# Altium PCB RD_BUCK.PcbDoc
Units mm, origin at the board's own origin, x right, y up, seen from the top; angles counter-clockwise.
Board outline 74.55 x 28.47 mm, 2 copper layers (Top Layer, Bottom Layer); 44 components, 24 nets, 124 pads, 0 vias.
Unrouted connection lines stored in the file: 85.
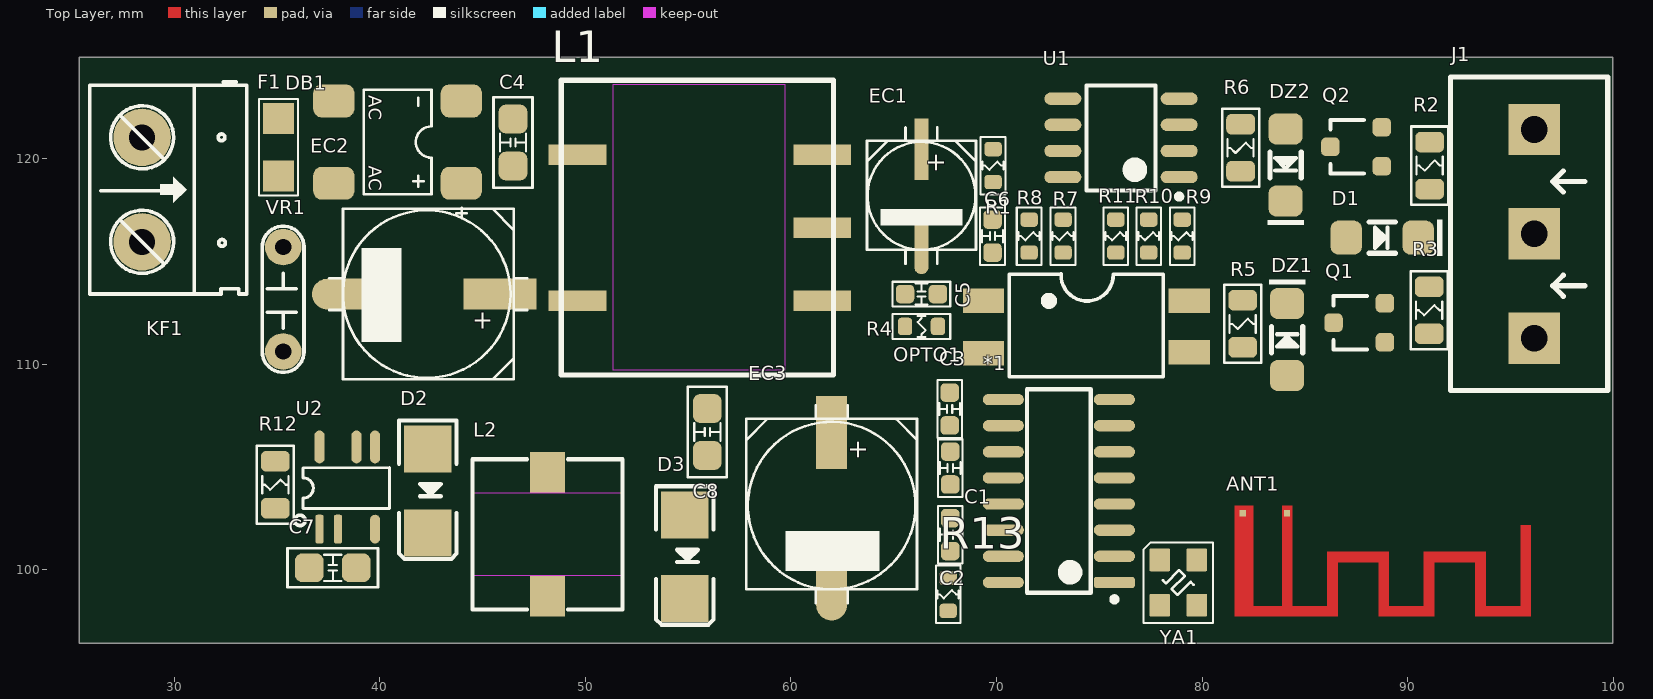
[diagram p0: Top Layer view]
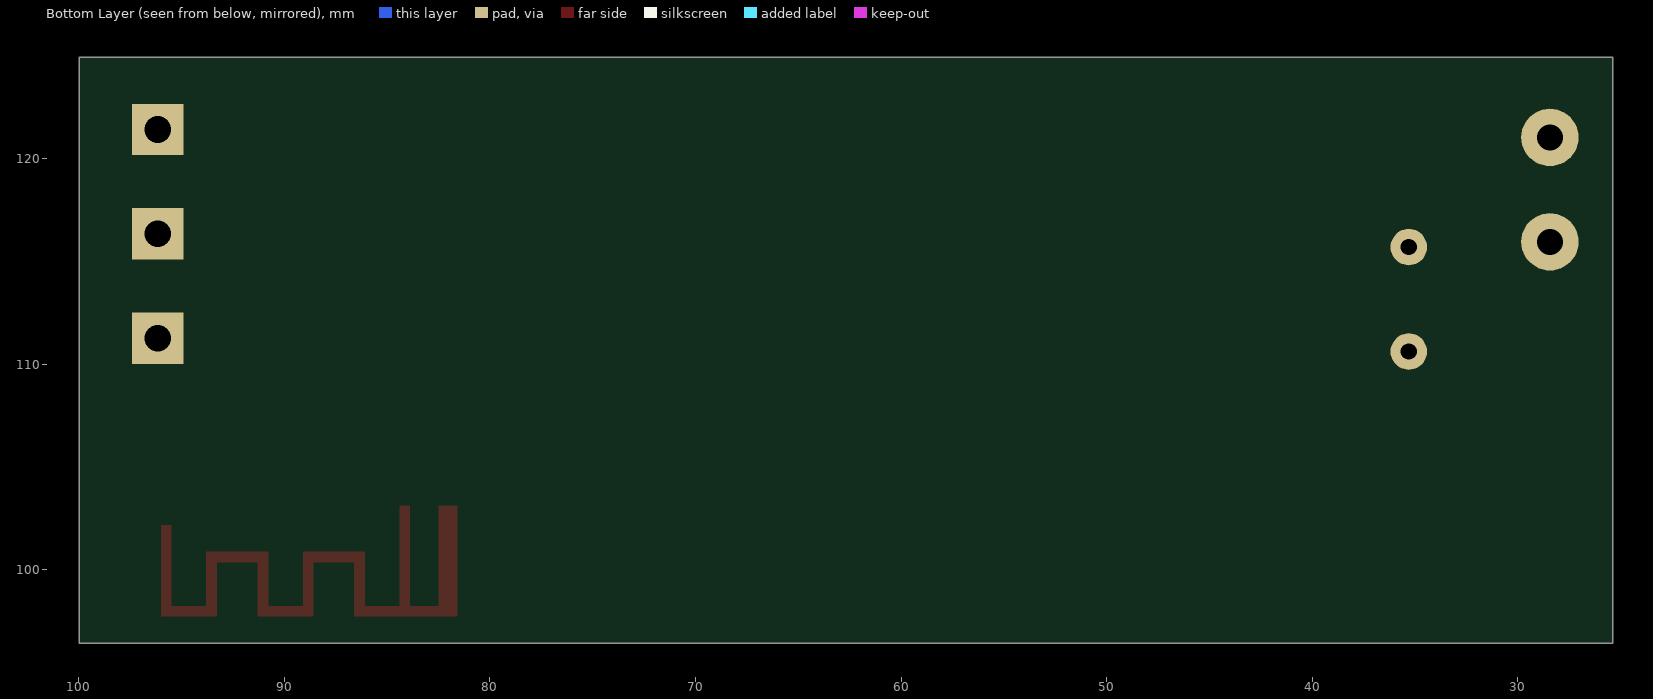
[diagram p1: Bottom Layer view, seen from below]

## Layer stack, top to bottom
Top Solder: solder mask 0.0102, Solder Resist, Dk 3.5
Top Layer: signal copper 0.0356
Dielectric 1: dielectric 0.32, FR-4, Dk 4.8
Bottom Layer: signal copper 0.0356
Bottom Solder: solder mask 0.0102, Solder Resist, Dk 3.5

## Board outline
25.4,96.444 99.949,96.444 99.949,124.917 25.4,124.917

## Design rules (kind name [scope] priority, off if disabled: settings)
Clearance [All] p1: gap=0.254 ignorepadtopadclearanceinfootprint=FALSE except(0: Arc-Hole Track-Hole SMDPad-Hole THPad-Hole Via-Hole Fill-Hole Poly-Hole Region-Hole Text-Hole)
PolygonConnect [All] p1: connectstyle=Relief reliefconductorwidth=0.254 reliefentries=4 polygonreliefangle="90 Angle" airgapwidth=0.254
RoomDefinition RD_BUCK [InComponentClass('RD_BUCK')] p1: confinementstyle=ConfineIn formatcopy=TRUE lockcomponents=FALSE outline 179.324,23.876 391.922,23.876 391.922,42.291 179.324,42.291
RoutingVias [All] p1: holewidth=0.29 width=0.5 viastyle="Through Hole" minholewidth=0.29 minwidth=0.5 maxholewidth=0.29 maxwidth=0.5
SolderMaskExpansion [All] p1: expansion=0.102 istentingtop=FALSE
Width [All] p1: maxlimit=0.5 minlimit=0.254 preferedwidth=0.254
30 further rules are at their usual default settings.

## Components (designator, comment, footprint, x,y, rotation, side; value= is the part's Value field where it differs from the comment)
*1 "TG7111B" SO16 73.025,103.835 r180 top
ANT1 "Anten" "Anten 2.4GHz 15.7-5.7 - duplicate" 84.125,102.752 r180 top
C1 "0.1uF" CN-SMD-0603 67.742,101.714 r270 top value=33pF
C2 "0.1uF" CN-SMD-0603 67.742,104.953 r270 top value=33pF
C3 "2.2uF" CN-SMD-0603 67.716,107.823 r90 top value=33pF
C4 "0.01uF" CN-SMD-0805 46.482,120.777 r270 top value=33pF
C5 "104" CN-SMD-0603 66.345,113.411 r180 top value=33pF
C6 "Cap_SMD" CN-SMD-0603 69.799,116.23 r90 top value=33pF
C7 "Cap_SMD" CN-SMD-0805 37.719,100.101 r0 top value=33pF
C8 "0.01uF" CN-SMD-0805 55.931,106.705 r90 top value=33pF
D1 "Diode SMD" DIO-SMD-123 88.748,116.154 r180 top value=1N5007
D2 "Diode SMD" DIO-SMD-106 42.342,103.835 r90 top value=1N5007
D3 "Diode SMD" DIO-SMD-106 54.839,100.635 r90 top value=1N5007
DB1 "Diode Brideg" MD_ABS16_smd 40.767,120.777 r0 top value="Cau 1A"
DZ1 "DIODE Zener" DIO-SMD-123 84.125,111.201 r270 top
DZ2 "DIODE Zener" DIO-SMD-123 84.049,119.685 r90 top
EC1 "63V-10uF" CAP-ALU-SMD-C 66.345,118.161 r270 top
EC2 "400V-6,8uF" CAP-ALU-SMD-F 42.291,113.411 r180 top
EC3 "6.3V-470uF" CAP-ALU-SMD-F 61.976,103.124 r270 top
F1 "Fuse smd" Fuse_smd 35.052,120.65 r270 top
J1 "KF3" KF3-5.08 96.139,111.265 r90 top
KF1 "CON 2 KF301" "Con 2 KF301 5.08" 28.448,121.031 r270 top
L1 "L-DIP-1" PCBComponent_1 49.619,113.087 r90 top value="150 mH"
L2 "Inductor" L-SMD-M-7.3x4.5 48.158,101.727 r180 top
OPTO1 "PC817" "PC817 smd" 74.473,111.836 r0 top
Q1 "???" SOT23-132 87.63,112.014 r90 top
Q2 "???" SOT23-132 87.478,120.574 r90 top
R1 "200k" RES-SMD-0603 69.825,119.659 r270 top
R2 "47k" RES-SMD-0805 91.059,119.659 r270 top
R3 "47k" RES-SMD-0805 91.034,112.624 r270 top
R4 "200" RES-SMD-0603 66.345,111.836 r0 top
R5 "10k" RES-SMD-0805 81.966,111.963 r270 top
R6 "10k" RES-SMD-0805 81.864,120.523 r90 top
R7 "200" RES-SMD-0603 73.228,116.23 r270 top
R8 "10k" RES-SMD-0603 71.577,116.23 r270 top
R9 "3k6" RES-SMD-0603 79.019,116.23 r270 top
R10 "2R" RES-SMD-0603 77.394,116.23 r270 top
R11 "1R87" RES-SMD-0603 75.794,116.23 r270 top
R12 "R330" RES-SMD-0805 34.925,104.14 r270 top
R13 "1k5" RES-SMD-0603 67.64,98.806 r90 top
U1 "IC BP2886" SO8 76.048,121.006 r180 top
U2 "3.3V - 5V" "BP SOT33-5L" 37.073,101.981 r90 top
VR1 "varistor" CN2 35.306,110.617 r90 top
YA1 "24M" XTAL-SMD 78.831,99.382 r270 top

## Footprints (in the part's own frame and the unit in brackets; to place one, negate y for a bottom-side part, rotate by r counter-clockwise, add the part's x,y. Pads: shape width x height; smd on the part's side, far side on the other; paste and mask are expansions set on the pad)
"Anten 2.4GHz 15.7-5.7 - duplicate" [mm]
  rect 0.3x0.3 smd paste+0 mask+0.102: 1(0,0) 2(2.159,0)
  Top Layer region: -11.853,0.575 -11.853,5.015 -11.353,5.015 -11.353,0.575
  Top Layer region: -9.653,5.015 -9.653,1.875 -9.153,1.875 -9.153,5.015
  Top Layer region: -7.153,1.875 -7.153,5.015 -6.653,5.015 -6.653,1.875
  Top Layer region: -4.953,5.015 -4.953,1.875 -4.453,1.875 -4.453,5.015
  Top Layer region: -9.153,4.515 -9.153,5.015 -11.853,5.015 -11.853,4.515
  Top Layer region: -4.453,4.515 -4.453,5.015 -7.153,5.015 -7.153,4.515
  Top Layer region: -1.953,1.875 -1.953,2.375 -4.953,2.375 -4.953,1.875
  Top Layer region: -1.953,5.015 -1.953,1.875 -2.453,1.875 -2.453,5.015
  Top Layer region: 2.547,-0.375 2.547,5.015 1.647,5.015 1.647,-0.375
  Top Layer region: 0.247,-0.375 0.247,5.015 -0.253,5.015 -0.253,-0.375
  Top Layer region: 2.547,4.515 2.547,5.015 -2.453,5.015 -2.453,4.515
  Top Layer region: -6.653,1.875 -6.653,2.375 -9.653,2.375 -9.653,1.875
"BP SOT33-5L" [mm] "4x4x1.3mm"
  rrect50% 1.4x0.4 smd: 1(0,0) 2(0,-0.9)
  oval 1.4x0.5 smd: 3(0,-2.7)
  oval 1.6x0.5 smd: 4(4,-2.7) 4(4,-1.8) 5(4,0)
  silkscreen extent 0.17,-3.4 3,1.2, body extent 0.75,-3.3 3.25,0.6, height 1.75
CAP-ALU-SMD-C [mm]
  rect 3x0.7 smd: 1(-2.286,0)
  oval 3x0.7 smd: 2(2.286,0)
  silkscreen extent -3.35,-2.65 3.28,2.65, body extent -2.95,-2.65 2.95,2.65, height 5.41
CAP-ALU-SMD-F [mil]
  rect 140x59.06 smd: 1(-140,0)
  oval 140x59.06 smd: 2(150,0)
  silkscreen extent -192,-163 187,163, body extent -195,-163 195,163, height 402
CN2 [mil]
  round 70 hole 31: 1(0,0) 2(200,0)
  silkscreen extent -40,-40 240,40, body extent -54,-44 260,55, height 407
CN-SMD-0603 [mm]
  rrect50% 0.9x0.9 smd: 1(-0.8,0) 2(0.8,0)
  silkscreen extent -1.4,-0.6 1.4,0.6, body extent -0.8,-0.4 0.8,0.4, height 0.3
CN-SMD-0805 [mm]
  rrect50% 1.4x1.4 smd: 1(-1.143,0) 2(1.143,0)
  silkscreen extent -2.2,-0.95 2.2,0.95, body extent -1,-0.62 1,0.63, height 0.8
"Con 2 KF301 5.08" [mil]
  round 110 hole 50: 1(0,0) 2(200,0)
  silkscreen extent -106,-100 300,200, body extent -45,-97 255,190, height 335
DIO-SMD-106 [mil]
  rect 90x90.55 smd: 1(80,0) 2(-80,0)
  silkscreen extent -130,-55 135,55, body extent -99,-50 106,52, height 95
DIO-SMD-123 [mil]
  rrect50% 60x65 smd: 1(68.9,0) 2(-68.9,0)
  silkscreen extent -115,-35 25,35, body extent -69,-31 76,32, height 49
Fuse_smd [mm] "Fuse_smd"
  rect 1.5x1.5 smd: 1(-1.298,0.025) 2(1.502,0.025)
  silkscreen extent -2.24,-0.92 2.45,0.97, body extent -1.19,-0.68 1.41,0.74, height 0.65
KF3-5.08 [mm]
  rect 2.5x2.5 hole 1.3: 1(0,0) 2(5.08,0) 3(10.147,0)
  silkscreen extent -2.54,-3.58 12.7,4.06, body extent -2.42,-3.51 12.58,3.99, height 10
L-SMD-M-7.3x4.5 [mm] "WE-PDA SMD Shielded Power Inductor, 7345"
  rect 1.7x2 smd: 1(0,3) 2(0,-3)
  Top Layer keep-out region: -3.65,-2 3.65,-2 3.65,2 -3.65,2
  silkscreen extent -3.65,-3.65 3.65,3.65, body extent -3.65,-3.65 3.65,3.65, height 4.05
MD_ABS16_smd [mm]
  rrect50% 2x1.6 smd: 1(3.2,-1.975) 2(-3,-1.975) 3(-3,2.025) 4(3.2,2.025)
  silkscreen extent -1.55,-3.68 3.47,2.56, body extent -3.2,-2.55 3.2,2.55, height 1.45
"PC817 smd" [mm] "PC817 smd"
  rect 2x1.2 smd: 1(-5.105,1.245) 2(-5.105,-1.295) 3(4.895,-1.255) 4(4.895,1.245)
  silkscreen extent -3.86,-2.44 3.63,2.55, body extent -5.1,-2.32 4.9,2.26, height 3.85
PCBComponent_1 [mm]
  rect 1x2.8 smd: 1(0,0) 2(7.1,0) 3(0,-11.9) 3(3.55,-11.9) 3(7.1,-11.9)
  Top Layer keep-out region: -3.352,-10.109 10.491,-10.109 10.491,-1.702 -3.352,-1.702
  silkscreen extent -3.61,-12.45 10.72,0.79
RES-SMD-0603 [mm]
  rrect50% 0.7x0.85 smd: 1(-0.8,0) 2(0.8,0)
  silkscreen extent -1.4,-0.6 1.4,0.6, body extent -0.8,-0.4 0.8,0.4, height 0.43
RES-SMD-0805 [mm]
  rrect50% 1x1.4 smd: 1(-1.143,0) 2(1.143,0)
  silkscreen extent -1.9,-0.9 1.9,0.9, body extent -1,-0.62 1,0.63, height 0.8
SO8 [mm] "SOIC, 8-Leads, Body 4.9x3.9mm, Pitch 1.27mm, IPC High Density"
  oval 1.8x0.6 smd: 1(-2.825,1.905) 2(-2.825,0.635) 3(-2.825,-0.635) 4(-2.825,-1.905) 5(2.825,-1.905) 6(2.825,-0.635) 7(2.825,0.635) 8(2.825,1.905)
  silkscreen extent -2.95,-2.55 1.68,2.98, body extent -2.99,-2.45 3,2.45, height 1.6
SO16 [mm] "SOIC, 16-Leads, Body 9.90x3.91mm, Pitch 1.27mm, IPC Medium Density"
  rrect50% 2x0.55 smd: 1(-2.7,4.445)
  oval 2x0.55 smd: 2(-2.7,3.175) 3(-2.7,1.905) 4(-2.7,0.635) 5(-2.7,-0.635) 6(-2.7,-1.905) 7(-2.7,-3.175) 8(-2.7,-4.445) 9(2.7,-4.445) 10(2.7,-3.175) 11(2.7,-1.905) 12(2.7,-0.635) 13(2.7,0.635) 14(2.7,1.905) 15(2.7,3.175) 16(2.7,4.445)
  silkscreen extent -2.83,-4.95 1.55,5.39, body extent -3,-4.95 3,4.95, height 1.4
SOT23-132 [mm]
  rrect50% 0.9x0.9 smd: 1(-0.95,-1.25) 2(0.95,-1.25) 3(0,1.25)
  silkscreen extent -1.3,-0.38 1.3,1.25, body extent -1.52,-1.23 1.48,1.27, height 1.06
XTAL-SMD [mm]
  rrect10% 1.1x1 smd: 1(-1.1,-0.9) 2(1.1,0.9) 3(1.1,-0.9) 4(-1.1,0.9)
  silkscreen extent -1.96,-1.7 1.96,1.7, body extent -1.6,-1.25 1.6,1.25, height 0.9

## Part data
ANT1: Manufacturer="W¨¹rth Elektronik eiSos GmbH", partNo=613002143121, ComponentLink1 Description=Manufacturer, ComponentLink1URL=http://www.we-online.com, ComponentLink2 Description=Datasheet, ComponentLink2URL=http://katalog.we-online.de/em/datasheet/6130xx143121.pdf, Created by="Karrer Zheng", Created Date="29 March 2013", NoPins=02
C1 C2 C3 C4 C5 C8: library part Cap_SMD
D1 D2 D3: "Default Diode", Code - JEDEC=DO-214-AB, Published=8-Jun-2000, Publisher="Altium Limited", Revision="July-2002: Re-released for DXP Platform."
DB1: library part "DIODE BRIGDE", "Convert AC to DC voltage, 4 pin"
DZ1 DZ2: "Zenner"
EC1 EC2 EC3: library part Cap_SMD_AL, "Polarized Capacitor (Axial)", LatestRevisionDate=17-Jul-2002, LatestRevisionNote="Re-released for DXP Platform.", PackageReference=POLAR0.8, Published=8-Jun-2000, Publisher="Altium Limited"
F1: library part Fuse_smd
J1: Manufacturer="Würth Elektronik eiSos GmbH", partNo=691103110003, ComponentLink1 Description=Manufacturer, ComponentLink1URL=http://www.we-online.com, ComponentLink2 Description=Datasheet, ComponentLink2URL=http://katalog.we-online.de/em/datasheet/6911031100xx.pdf, Created by="Karrer Zheng", Created Date="29 October 2013", NoPins=3
KF1: "Cắm", Chung_Loai=Cắm, Don_Vi=Con, Ma_Hang=MH000987, Ten_Linh_Kien="CON 2 KF301-2P 5.08MM Xanh Dương"
L1: "Inductor"
Q1 Q2: library part "MOSFET N"
R1 R2 R3 R4 R5 R6 R7 R8 R9 R10 R11 R12 R13: library part Res-SMD, "Resistor", Manufacturer="Generic Components", Class=Passive, Published=08/06/2000, Publisher="Altium Hobart Technology Centre"
U1: library part "IC BP2886X", "Dimmable Non-isolated LFC Buck LED Driver"
U2: library part "IC BP2525X"
YA1: library part CRYSTAL, "Crystal"

## Nets (pads, with @x,y where several pads share a name; then routed paths per layer and width w, separated by ;. In a path a pad name is that pad's centre, name@x,y a point inside that pad or via, vN(x,y) a via of type N, cw(c..) or ccw(c..) an arc to the next point about the centre after c; other vN are vias at no path point)
3.3V: *1.10 C3.1 C8.2 D2.1 EC3.1 L2.2 R4.1 R13.2
Ant: *1.4 ANT1.1
GND: *1.2 *1.3 *1.5 C1.1 C2.2 C3.2 C4.1 C5.1 C6.1 C8.1 D3.1 DB1.4 EC2.2 EC3.2 R8.2 R9.2 R10.2 R11.2 R13.1 U1.2 YA1.1 YA1.2
Net*1_1: *1.1 C1.2
Net*1_11: *1.11 C2.1
NetC5_2: C5.2 DZ1.1 DZ2.1 EC1.2 L1.1 OPTO1.3 Q1.3 Q2.3 R1.2 R5.2 R6.2
NetC6_2: C6.2 R7.1 R8.1 U1.7
NetC7_1: C7.1 D3.2 L2.1 R12.2 U2.1
NetC7_2: C7.2 D2.2 U2.2 U2.3
NetD1_1: D1.1 DZ2.2 Q2.1 R2.2 R6.1
NetD1_2: D1.2 J1.2 Q1.2
NetDB1_2: DB1.2 F1.2 VR1.2
NetDB1_3: DB1.3 KF1.2 VR1.1
NetDZ1_2: DZ1.2 OPTO1.4 Q1.1 R3.2 R5.1
NetF1_1: F1.1 KF1.1
NetJ1_3: J1.3 Q2.2
NetL1_2: L1.2 U1.5
NetOPTO1_1: OPTO1.1 R4.2
NetR9_1: R9.1 U1.1
NetR10_1: R10.1 R11.1 U1.8
NetR12_1: R12.1 U2.5
PWM1: *1.15 R7.2
PWM2: *1.9 OPTO1.2
Vdc: C4.2 DB1.1 EC1.1 EC2.1 J1.1 R1.1 R2.1 R3.1 U1.4 U2.4
pads on no net: *1.6 *1.7 *1.8 *1.12 *1.13 *1.14 *1.16 ANT1.2 L1.3 U1.3 U1.6 YA1.3 YA1.4

## Text inside footprints (layer, text, board x,y; h text height)
DB1: Top Overlay "AC" at 39.47,119.659 h0.64 r270; Top Overlay "AC" at 39.47,123.088 h0.64 r270
EC1: Top Overlay "+" at 66.67,120.311 h0.89 r270
EC2: Top Overlay "+" at 45.516,112.511 h0.89 r180
EC3: Top Overlay "+" at 62.876,106.349 h0.89 r270